# Altium PCB main.PcbDoc (part 4 of 8)
Units mil, origin at the board's own origin, x right, y up, seen from the top; angles counter-clockwise.
Board outline 3385.83 x 2362.2 mil, 8 copper layers (L1 (SIG), L2 (GND), L3 (SIG), L4 (GND), L5 (PWR), L6 (SIG), L7 (GND), L8 (SIG)), stack 46.958 mil thick; 318 components, 288 nets, 1482 pads, 1056 vias.
Unrouted connection lines stored in the file: 7.
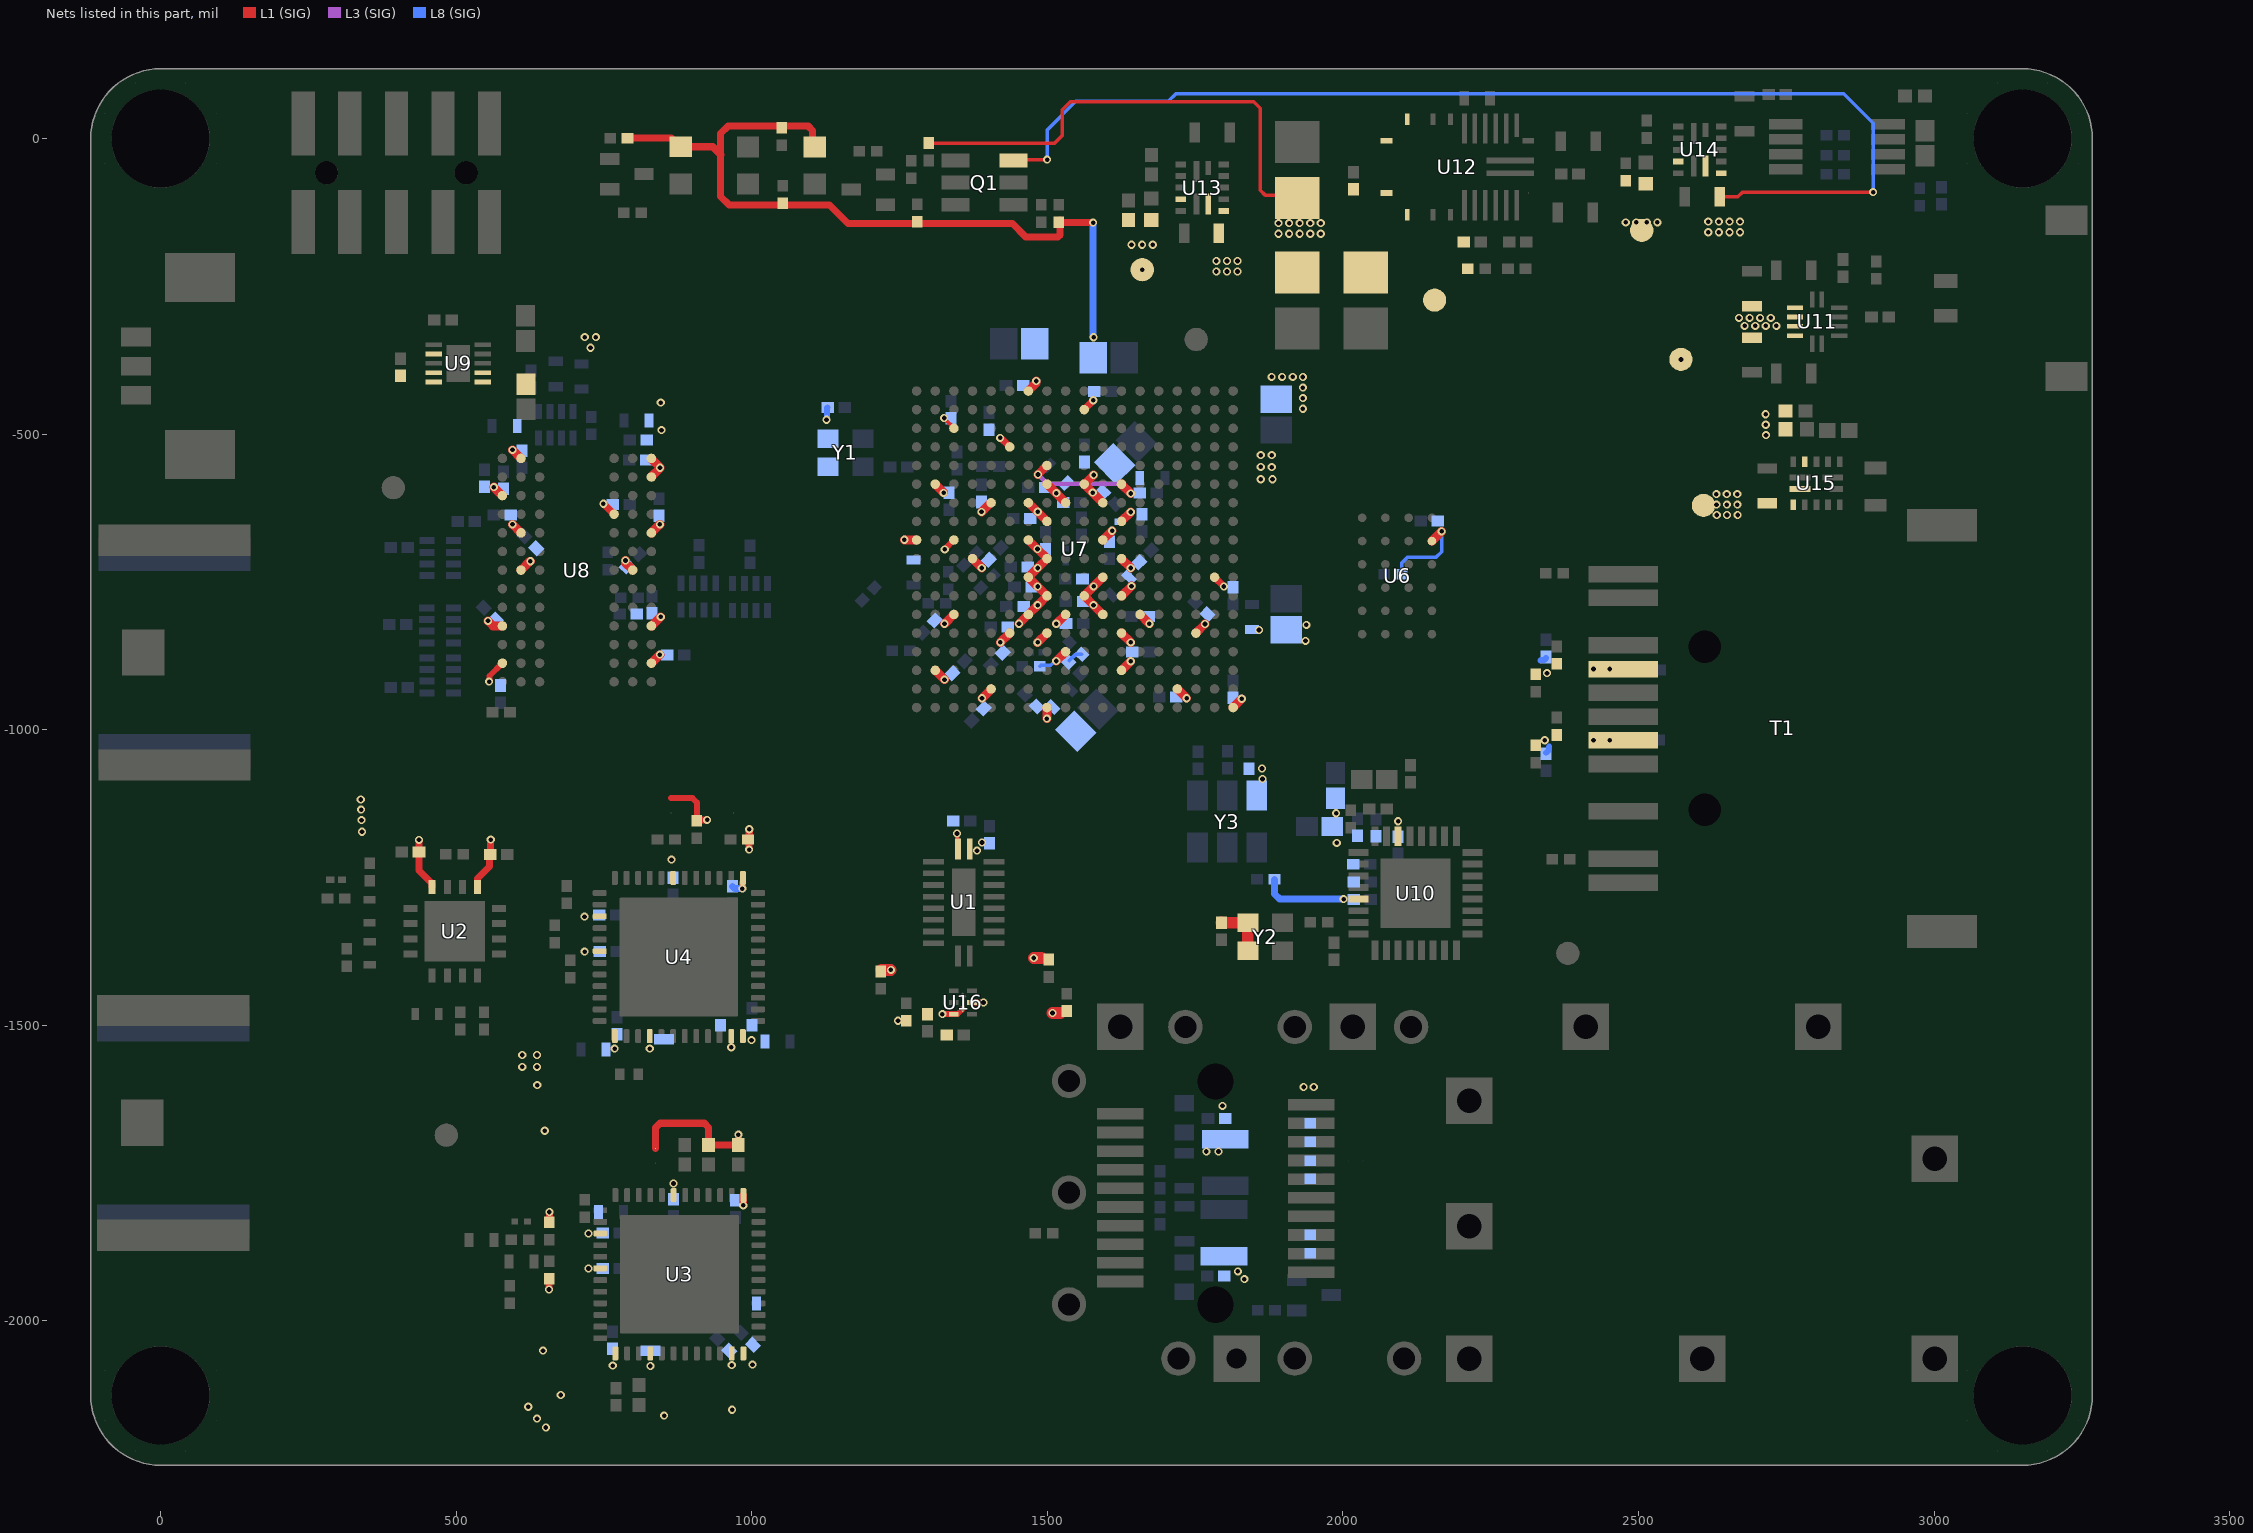
[diagram p8: the nets of this part, all layers, seen from the top]

## Part data (continued)
U4: "3 Gbps, HD, SD, DVB-ASI SDI Deserializer with Loopthrough and LVDS Interface, 48-pin LLP, Pb-Free", Case/Package=0402, Manufacturer="Texas Instruments", Manufacturer Part Number=RC0402FR-075KL, Max Operating Temperature=155°C, Max Power Dissipation=63mW, Min Operating Temperature=-55°C, PackageTopMarking=NS*UZXYTTE#*L0341, Power Dissipation=62.5mW, PowerWise=N, Supplier Part Number=3950792, Temperature Coefficient=100ppm/°C, Tolerance=1%, Voltage Rating=50V, Category="Chip SMD Resistors", China RoHS=Non-Compliant, Code_JEDEC=MO-220-WKKD-2, ComponentLink1Description="Datasheet URL", ComponentLink1URL=http://www.ti.com/general/docs/lit/getliterature.tsp?genericPartNumber=LMH0341&fileType=pdf, ComponentLink2Description=https://datasheet.octopart.com:443/RC0402FR-075KL-Yageo-datasheet-127823281.pdf?src-supplier=Upverter, ComponentLink2URL=https://datasheet.octopart.com:443/RC0402FR-075KL-Yageo-datasheet-127823281.pdf?src-supplier=Upverter, ComponentLink3Description=https://datasheet.octopart.com:443/RC0402FR-075KL-Yageo-datasheet-137700087.pdf?src-supplier=IHS, ComponentLink3URL=https://datasheet.octopart.com:443/RC0402FR-075KL-Yageo-datasheet-137700087.pdf?src-supplier=IHS, ComponentLink4Description=https://datasheet.octopart.com:443/RC0402FR-075KL-Yageo-Group-datasheet-176638170.pdf?src-supplier=Future+Electronics, ComponentLink4URL=https://datasheet.octopart.com:443/RC0402FR-075KL-Yageo-Group-datasheet-176638170.pdf?src-supplier=Future+Electronics, ComponentLink5Description=https://datasheet.octopart.com:443/RC0402FR-075KL-Yageo-datasheet-164759695.pdf?src-supplier=Future+Electronics, ComponentLink5URL=https://datasheet.octopart.com:443/RC0402FR-075KL-Yageo-datasheet-164759695.pdf?src-supplier=Future+Electronics, ComponentLink6Description=https://datasheet.octopart.com:443/RC0402FR-075KL-Yageo-datasheet-175887523.pdf?src-supplier=Newark, ComponentLink6URL=https://datasheet.octopart.com:443/RC0402FR-075KL-Yageo-datasheet-175887523.pdf?src-supplier=Newark, ComponentLink7Description=https://datasheet.octopart.com/RC0402FR-075KL-Yageo-datasheet-73766026.pdf, ComponentLink7URL=https://datasheet.octopart.com/RC0402FR-075KL-Yageo-datasheet-73766026.pdf, ComponentLink8Description=http://sigma.octopart.com:80/conflict_mineral_statement/Yageo-company-3.pdf?src-supplier=Compliance+Statements, ComponentLink8URL=http://sigma.octopart.com:80/conflict_mineral_statement/Yageo-company-3.pdf?src-supplier=Compliance+Statements, ComponentLink9Description=http://sigma.octopart.com:80/rohs_statement/Yageo-company-2.pdf?src-supplier=Compliance+Statements, ComponentLink9URL=http://sigma.octopart.com:80/rohs_statement/Yageo-company-2.pdf?src-supplier=Compliance+Statements, Composition="Thick Film", CompType="Interface IC", Country of Origin="Mainland China, Taiwan", Export Control Classification Number (ECCN) Code=EAR99, Features="Moisture Resistant", Harmonized Tariff Schedule (HTS) Code=8533.21.00.30, Height=350µm, Introduction Date=2011-11-17, Length=990.6µm, Lifecycle Status=Production, Mounting Technology="Surface Mount", Number of Terminals=2, Number of Terminations=2, PackageDescription="LLP, Plastic, Quad, 7 x 7 x 0.8mm Body, 48 Lead, 0.5mm Pitch, No Pullback", PackageReference=RHS0048A, Part Number=LMH0341SQX/NOPB, PinCount=48, Power Rating=62.5mW, Pricing="10=2.15, 100=1.16, 500=0.992, 2500=0.823, 5000=0.807 (JPY)", REACH SVHC=Yes, RoHS=Y, Schedule B="8533210045, 8533210045|8533210045|8533210045|8533210045|8533210045", Stock=54567, Supplier=Farnell, Width=500µm, Working Voltage=50V
U5: "IC POWER SUPPLY SEQUENCER 8VSSOP", Manufacturer="Texas Instruments", Max Junction Temp=+125°C, Max Supply Voltage=5.5V, Min Supply Voltage=2.7V, Nominal Supply Current=80uA, Output Current=0.001uA, Package=DGK0008A, Temperature="-40°C to +125°C", Temperature Range Low=-40°C, Threshold Voltage=1.22V, Automotive=No, Category=IC, ComponentLink2Description=Datasheet, ComponentLink2URL=http://www.ti.com/lit/ds/symlink/lm3881.pdf, Device Class L1="Integrated Circuits (ICs)", Device Class L2="Power Management ICs", Device Class L3="Voltage Supervisors", Digikey Description="IC POWER SUPPLY SEQUENCER 8VSSOP", Footprint 0 Description="TSOP, 8-Leads, Body 3x3mm, Pitch 0.65mm, IPC Medium Density", Footprint 1 Description="TSOP, 8-Leads, Body 3x3mm, Pitch 0.65mm, IPC High Density", Footprint 2 Description="TSOP, 8-Leads, Body 3x3mm, Pitch 0.65mm, IPC Low Density", Height=1.1mm, Ipc Land Pattern Name=SOP65P300X110-8, Lead Free=Yes, Manufacturer Part Number=LM3881MME/NOPB, Mouser Description="3 Rail Simple Power Sequencer with Adjustable Time Delay 8-VSSOP -40 to 125", Number of Outputs=3, Number Of Rails Monitored=1, Octopart=https://octopart.com/lm3881mme%2Fnopb-texas+instruments-24814197, Reset Timeout=9.6ms, Reset Type="Active Low,Active High", RoHS=TRUE, Standoff Height=0.05mm, Temperature Range High=+125°C
U6: "Integrated Circuit", Manufacturer_Name=Infineon, Mouser Part Number=797-25FL256SAGBHI200, Arrow Part Number=S25FL256SAGBHI200, Arrow Price/Stock=https://www.arrow.com/en/products/s25fl256sagbhi200/infineon-technologies-ag?utm_currency=USD&region=nac, Datasheet Link=https://www.cypress.com/file/448601/download, Height=1.2mm, Manufacturer_Part_Number=S25FL256SAGBHI200, Mouser Price/Stock=https://www.mouser.co.uk/ProductDetail/Infineon-Technologies/S25FL256SAGBHI200?qs=%252B97ACBfLqz%2F7D9cRggMsKA%3D%3D
U7: "Integrated Circuit", Manufacturer_Name=AMD, Manufacturer_Part_Number=XC7A35T-2CSG324C, Mouser Part Number=217-XC7A35T-2CSG324C, Datasheet Link=https://www.xilinx.com/support/documentation/data_sheets/ds181_Artix_7_Data_Sheet.pdf, Height=1.5mm, Mouser Price/Stock=https://www.mouser.co.uk/ProductDetail/AMD-Xilinx/XC7A35T-2CSG324C?qs=rrS6PyfT74fMA9%2F3WtPZmw%3D%3D
U8: "Integrated Circuit", Arrow Part Number="MT41K512M8DA-107 IT:P", Manufacturer_Name=Micron, Mouser Part Number=340-265832-TRAY, Arrow Price/Stock=https://www.arrow.com/en/products/mt41k512m8da-107-itp/micron-technology?region=europe, Datasheet Link=https://datasheet.datasheetarchive.com/originals/distributors/DKDS42/DSANUWW0045409.pdf, Height=1.2mm, Manufacturer_Part_Number="MT41K512M8DA-107 IT:P", Mouser Price/Stock=https://www.mouser.co.uk/ProductDetail/Micron/MT41K512M8DA-107-ITP?qs=rrS6PyfT74e6FNRbiIMwlg%3D%3D
U9: "Integrated Circuit", Manufacturer_Name="Texas Instruments", Mouser Part Number=595-TPS51206DSQR, Arrow Part Number=TPS51206DSQR, Arrow Price/Stock=https://www.arrow.com/en/products/tps51206dsqr/texas-instruments?region=nac, Datasheet Link=http://www.ti.com/lit/ds/symlink/tps51206.pdf, Height=0.8mm, Manufacturer_Part_Number=TPS51206DSQR, Mouser Price/Stock=https://www.mouser.co.uk/ProductDetail/Texas-Instruments/TPS51206DSQR?qs=%252BG2H6gVb6ixLbD%2FQxTGyiQ%3D%3D
U10: library part TLK106RHBR, "Integrated Circuit", Manufacturer_Name="Texas Instruments", Mouser Part Number=595-TLK106RHBR, Arrow Part Number=TLK106RHBR, Arrow Price/Stock=https://www.arrow.com/en/products/tlk106rhbr/texas-instruments, Datasheet Link=http://www.ti.com/lit/gpn/tlk106, Height=1mm, Manufacturer_Part_Number=TLK106RHBR, Mouser Price/Stock=https://www.mouser.co.uk/ProductDetail/Texas-Instruments/TLK106RHBR?qs=1sbE9T7hb3adXa9F43EQXg%3D%3D
U11: "Integrated Circuit", Manufacturer_Name="Monolithic Power Systems (MPS)", Mouser Part Number=946-MP5077GG-Z, Datasheet Link=http://www.monolithicpower.com/DesktopModules/DocumentManage/API/Document/getDocument?id=3265, Height=1mm, Manufacturer_Part_Number=MP5077GG-Z, Mouser Price/Stock=https://www.mouser.co.uk/ProductDetail/Monolithic-Power-Systems-MPS/MP5077GG-Z?qs=AfGmtpoX2ghv3QovAD4CRg%3D%3D
U12: "Integrated Circuit", Manufacturer_Name="Monolithic Power Systems (MPS)", Mouser Part Number=946-MPM3860GQW-Z, Datasheet Link=https://www.monolithicpower.com/en/documentview/productdocument/index/version/2/document_type/Datasheet/lang/en/sku/MPM3860GQW-Z/document_id/8686/, Height=1.65mm, Manufacturer_Part_Number=MPM3860GQW-Z, Mouser Price/Stock=https://www.mouser.co.uk/ProductDetail/Monolithic-Power-Systems-MPS/MPM3860GQW-Z?qs=vmHwEFxEFR%2FBBZgXfldbaA%3D%3D
U13 U14 U15: "Integrated Circuit", Manufacturer_Name="Monolithic Power Systems (MPS)", Mouser Part Number=946-MPM3834CGPA-P, Datasheet Link=https://www.monolithicpower.com/en/documentview/productdocument/index/version/2/document_type/Datasheet/lang/en/sku/MPM3834CGPA/document_id/9651/, Height=1.31mm, Manufacturer_Part_Number=MPM3834CGPA-P, Mouser Price/Stock=https://www.mouser.co.uk/ProductDetail/Monolithic-Power-Systems-MPS/MPM3834CGPA-P?qs=By6Nw2ByBD1gcNTTHPVSOg%3D%3D
U16: "Integrated Circuit", Manufacturer_Name="Texas Instruments", Mouser Part Number=595-TCA39306DTMR, Arrow Part Number=TCA39306DTMR, Arrow Price/Stock=https://www.arrow.com/en/products/tca39306dtmr/texas-instruments?utm_currency=USD&region=nac, Datasheet Link=https://www.ti.com/general/docs/suppproductinfo.tsp?distId=26&gotoUrl=https://www.ti.com/lit/gpn/tca39306, Height=0.4mm, Manufacturer_Part_Number=TCA39306DTMR, Mouser Price/Stock=https://www.mouser.co.uk/ProductDetail/Texas-Instruments/TCA39306DTMR?qs=A6eO%252BMLsxmTNftHJNMUhEw%3D%3D
Y1: "MEMS OSC XO 100.0000MHZ HCMOS"
Y2: "Crystal or Oscillator", Manufacturer_Name=SiTime, Datasheet Link=https://www.sitime.com/support/resource-library/datasheets/sit8008-datasheet, Height=0.85mm, Manufacturer_Part_Number=SiT8008BI-73-XXS-25.000000
Y3: "Oscillator, 148.5Mhz, Lvds, 5Mm X 3.2Mm Rohs Compliant: Yes", Case/Package=CLCC, Max Input Voltage=3.465V, Max Operating Temperature=85°C, Max Output Frequency=999.9MHz, Min Input Voltage=3.135V, Min Operating Temperature=-40°C, ComponentLink1Description="Manufacturer's Website", ComponentLink1URL=http://www.renesas.com, ComponentLink2Description="Datasheet URL", ComponentLink2URL=https://octopart.com/cad-content/api/get-model-datasheet/15189/107081581, ComponentLink3Description="Manufacturer's Package Drawing", ComponentLink3URL=https://www.renesas.com/en/document/psc/js6-package-outline-50-x-32-mm-body-11-mm-thick, Height=1.2mm, HelpURL=https://octopart.com/cad-content/api/get-model-datasheet/15189/107081581, Mount="Surface Mount", Number of Pins=6, Output Type=LVDS, RoHS=Compliant

## Via types
v1: diameter 13.78, hole 7.87, L1 (SIG) to L8 (SIG), tented both sides, 1033 vias
v2: diameter 13.78, hole 7.87, L1 (SIG) to L8 (SIG), 23 vias

## Nets (pads, with @x,y where several pads share a name; then routed paths per layer and width w, separated by ;. In a path a pad name is that pad's centre, name@x,y a point inside that pad or via, vN(x,y) a via of type N, cw(c..) or ccw(c..) an arc to the next point about the centre after c; other vN are vias at no path point)
+1V0: C15.1 C16.2 C18.2 C21.2 C22.2 C99.1 C111.2 C112.2 C114.2 C115.2 C116.2 C117.2 C118.2 C120.2 C121.2 C122.2 C123.2 C124.2 C125.1 C126.1 C127.1 R6.1 R9.1 TP3.1 U7.F8 U7.F10 U7.G7 U7.G9 U7.G11 U7.H8 U7.J7 U7.J11 U7.K8 U7.L7 U7.L11 U7.M8 U7.M10 U7.N7 U7.N9 U7.N11 U12.9 U12.10 U12.11 U12.12 | length 1313.9
  L1 (SIG) w6: R9.1@1299.36,-7.59 1512.63,-7.59 1525.29,5.08 1525.29,48.51 1538.89,62.11 1849.4,62.1 1860.05,51.45 1860.05,-87.34 1868.22,-95.5 1919.34,-95.5 C16.2@1922.58,-92.27
  L1 (SIG) w10: U7.J7@1467.85,-679.01 U7.J7@1468,-679.01 ; v1@1483.16,-694.18 v1(1483.31,-694.18)
  L1 (SIG) w15: v1(1452.11,-820.74) U7.N7@1467.85,-805 v1(1483.6,-789.25) U7.M8@1499.35,-773.5 U7.L7@1467.85,-742 v1(1483.6,-726.26) U7.K8@1499.35,-710.51 ; U7.G7@1467.85,-616.02 1468.12,-616.02 U7.H8@1498.95,-646.85 ; U7.J7@1468,-679.01 v1@1483.16,-694.18 ; v1(1483.31,-694.18) 1499.5,-710.37 U7.K8@1499.5,-710.51 ; U7.F8@1499.35,-584.52 1499.66,-584.52 1514.81,-599.67 v1(1515.22,-599.67) ; v1(1515.1,-820.74) U7.N9@1530.85,-805 ; v1@1515.22,-600.13 U7.G9@1530.44,-615.35 ; U7.F10@1562.34,-584.52 U7.G11@1593.84,-616.02 ; U7.F10@1562.64,-584.08 1562.87,-584.3 1563.76,-583.41 1563.9,-583.41 v1(1578.25,-569.07) ; U7.N11@1593.84,-805 v1(1578.09,-789.25) U7.M10@1562.34,-773.5 1562.34,-773.36 v1(1578.22,-757.48) 1593.7,-742 U7.L11@1593.84,-742 ; U7.J11@1593.84,-679.01 v1(1609.59,-663.26)
  other v1: 1483.6,-757.75 1483.72,-631.17 1576.75,-598.93 1891.01,-160.94 1908.89,-160.94 1926.78,-160.94 1944.66,-160.94 1962.55,-160.94 1891.01,-143.05 1908.89,-143.05 1926.78,-143.05 1944.66,-143.05 1962.55,-143.05
+1V8: C14.1 C17.1 C103.1 C104.1 C105.1 C107.1 C108.1 C109.1 FB1.1 Q1.3 R5.1 TP4.1 U7.E8 U7.F12 U7.H12 U7.K12 U7.M12 U14.6 U14.9 U14.10 | length 2209.3
  L1 (SIG) w6: Q1.3@1442.79,-37.11 1444.32,-35.57 v1(1499.58,-35.57) ; C14.1@2639.55,-98.51 2667.86,-98.51 2675.82,-90.56 v1(2896.74,-90.56)
  L1 (SIG) w10: U7.M12@1625.33,-773.5 U7.M12@1625.82,-773.5
  L1 (SIG) w15: v1(1484.14,-568.15) 1499.46,-552.83 U7.E8@1499.46,-552.61 ; U7.K12@1625.33,-710.51 v1(1641.08,-726.26) ; U7.H12@1625.33,-647.52 v1(1641.08,-631.77) ; U7.F12@1625.33,-584.52 v1@1641.06,-600.25 ; U7.M12@1625.82,-773.5 v1(1642.36,-756.96)
  L3 (SIG) w8: v1(1484.14,-568.15) 1499.66,-583.68 1624.53,-583.68 1639.22,-598.36 1639.59,-598.36 v1@1640.02,-597.93
  L8 (SIG) w6: v1(1499.58,-35.57) 1499.58,14.6 1547.84,62.86 1704.69,62.86 1717.62,75.79 2847.05,75.79 2897.11,25.73 2897.11,-90.19 v1(2896.74,-90.56)
  other v1: 1641.1,-600.25 1932.16,-457 1932.16,-439.11 1932.16,-421.23 1879.31,-403.05 1897.2,-403.05 1915.08,-403.05 1932.16,-403.34 2618.01,-158.42 2635.9,-158.42 2653.78,-158.42 2671.67,-158.42 2478.27,-141.72 2496.16,-141.72 2514.04,-141.72 2531.93,-141.72 2618.01,-140.53 2635.9,-140.53 2653.78,-140.53 2671.67,-140.53
+1V35: C4.1 C5.1 C23.1 C29.2 C54.2 C85.2 C86.2 C87.2 C88.2 C90.2 C162.2 C173.1 C174.1 C175.1 C176.1 C177.1 C181.1 C182.1 C183.1 C184.1 C185.1 C186.1 C187.1 C188.1 C189.1 C190.1 C191.1 C192.1 R1.1 TP2.1 U7.A7 U7.C3 U7.D6 U7.F2 U7.G5 U7.J1 U7.J3 U8.A2 U8.A9 U8.B9 U8.C1 U8.D7 U8.E2 U8.E9 U8.G2 U8.G8 U8.K1 U8.K9 U8.M1 U8.M9 U9.1 U9.2 U13.6 U13.9 U13.10 Y1.1 Y1.4 | length 480.8
  L1 (SIG) w6.41: v1@1326.59,-473.78 1326.59,-474.31 U7.C3@1341.87,-489.59
  L1 (SIG) w10: v1(555.68,-918.63) 556.41,-917.91 556.41,-909.14 U8.M1@578.15,-887.4 ; U8.K1@578.15,-824.41 U8.K1@578.15,-824.41 ; U8.E2@609.54,-666.82 U8.E2@609.59,-666.82 ; U8.G2@609.64,-729.92 U8.G2@609.64,-729.65 ; U7.F2@1310.37,-584.86 U7.F2@1310.37,-584.52 ; v1(1324.48,-599.3) v1@1324.48,-598.97 ; v1@1325.37,-473.1 v1(1325.37,-472.66) ; v1(1326.32,-694.89) 1326.32,-694.56 U7.J3@1341.87,-679.01 ; v1(1388.69,-631.49) v1@1389.04,-631.49 ; U7.G5@1404.51,-616.02 U7.G5@1404.86,-616.02 ; U7.A7@1467.85,-427.04 U7.A7@1467.85,-425.38
  L1 (SIG) w12: v1(748.92,-617.78) 749.19,-617.78 766.85,-635.43 U8.D7@767.12,-635.43 ; v1(1420.04,-506.25) 1420.38,-506.59 1421.26,-506.59 1434.92,-520.26 1435.09,-520.26 U7.D6@1436.36,-521.53
  L1 (SIG) w15: v1(553.89,-815.79) 562.29,-824.19 577.82,-824.19 U8.K1@578.15,-824.41 ; v1@563.79,-589.53 U8.C1@578.1,-603.83 ; v1(595.24,-652.52) U8.E2@609.54,-666.82 ; v1@595.29,-526.53 U8.A2@609.59,-540.84 ; U8.G2@609.64,-729.65 609.7,-729.7 610.17,-729.7 624.81,-715.07 v1(625.47,-715.07) ; v1(786.35,-713.69) 786.35,-717.34 798.51,-729.5 U8.G8@798.51,-729.97 ; U8.M9@830.22,-887.35 v1@844.53,-873.05 ; U8.E9@830.22,-666.88 v1(844.53,-652.52) ; U8.K9@830.49,-824.03 830.64,-824.19 845.75,-809.08 v1(846.09,-809.08) ; U8.B9@830.52,-572.09 830.33,-571.91 844.73,-557.52 844.73,-555.86 830.33,-541.47 830.33,-541.38 U8.A9@830.52,-541.19 ; v1(1258.21,-678.67) 1258.33,-678.79 1278.66,-678.79 U7.J1@1278.88,-679.01 ; U7.F2@1310.37,-584.86 v1@1324.48,-598.97 ; v1@1389.04,-631.49 U7.G5@1404.51,-616.02 ; U7.A7@1467.85,-426.52 1468.07,-426.52 1481.29,-413.29 v1(1481.29,-409.94)
  L8 (SIG) w10: v1(1126.42,-475.56) 1127.15,-474.84 1127.15,-455.95 C29.2@1128.45,-454.65
  other v1: 844.53,-872.99 563.74,-589.53 844.73,-556.7 595.24,-526.53 847.26,-493.12 846.17,-446.57 727.19,-353.86 717.43,-335.85 736.36,-335.85 1785.94,-224.94 1803.83,-224.94 1821.71,-224.94 1660.46,-221.77 1785.94,-207.06 1803.83,-207.06 1821.71,-207.06 1642.39,-179.72 1660.27,-179.72 1678.16,-179.72
+2V5: C59.1 C60.1 C61.1 C62.1 C63.1 C91.1 C92.1 C93.1 C94.1 C95.1 C96.1 C97.1 C98.1 C101.2 C113.1 C130.1 C131.1 C132.1 C150.1 C160.1 C161.1 R24.1 R33.1 R64.2 R65.2 R74.1 TP5.1 U1.20 U3.7 U3.15 U3.18 U3.25 U3.35 U4.7 U4.25 U4.35 U7.K4 U7.N3 U7.P6 U7.T2 U7.U5 U7.V8 U15.6 U15.9 U15.10 U16.2 | length 208.3
  L1 (SIG) w10: U16.2@1372.46,-1461.25 v1(1392.07,-1461.25)
  L1 (SIG) w12: v1(657.09,-1946.82) 657.21,-1946.7 657.21,-1930.44 R65.2@657.33,-1930.32 ; R64.2@657.59,-1831.09 v1(657.59,-1815.61)
  L1 (SIG) w15: U7.T2@1310.37,-899.48 v1(1326.12,-915.23) ; v1(1326.12,-820.74) U7.N3@1341.87,-805 ; U7.K4@1373.37,-710.51 v1(1389.11,-726.26) ; v1(1389.55,-946.73) 1389.55,-946.6 1404.86,-931.29 U7.U5@1404.86,-930.98 ; v1(1420.61,-852.24) U7.P6@1436.36,-836.49 ; v1(1499.12,-981.09) 1499.13,-962.69 U7.V8@1499.35,-962.48
  L1 (SIG) w20: v1(1476.88,-1386.03) 1490.25,-1386.03 ; v1(1508.83,-1479.13) 1522.2,-1479.13
  other v1: 651.81,-2180.19 636.81,-2165.19 851.81,-2160.19 966.81,-2150.19 621.81,-2145.19 676.81,-2125.19 764.85,-2075.59 966.24,-2074.66 646.81,-2050.19 723.96,-1911.23 723.96,-1852.17 867.71,-1767.38 649.85,-1678.3 637.16,-1601.16 611.81,-1570.19 636.81,-1570.19 611.81,-1550.19 636.81,-1550.19 768,-1539.4 965.28,-1536.96 864.28,-1219.59 1381.12,-1204.5 1389.55,-1190.83 2632.22,-636.72 2649.73,-636.72 2667.54,-636.72 2631.91,-619.11 2649.41,-619.11 2667.22,-619.11 2631.59,-601.49 2649.09,-601.49 2666.91,-601.49 2715.58,-501.64 2715.26,-484.02 2714.95,-466.41
+3V3: C1.1 C2.1 C26.1 C30.1 C31.1 C32.1 C37.1 C39.1 C40.2 C42.2 C43.2 C44.2 C45.2 C46.2 C47.2 C48.2 C49.2 C50.2 C52.1 C53.1 C55.2 C56.2 C75.1 C78.1 C79.1 C80.1 C81.1 C82.1 C83.1 C84.1 C102.1 C110.1 C119.1 C128.1 C134.1 C135.1 C136.1 C137.1 C138.2 C148.1 C149.1 C151.2 C152.1 C157.2 C193.1 C194.1 L3.2 L4.2 LED2.2 LED3.2 R10.1 R13.2 R14.2 R15.1 R16.2 R17.1 R22.1 R23.1 R26.1 R27.2 R28.1 R29.2 R30.1 R36.1 R54.1 R70.1 R71.1 R78.1 R80.2 R82.1 R83.1 R84.1 R85.2 R86.1 R87.1 SB2.1 SB3.1 T1.2 T1.5 TP1.1 U1.1 U2.13 U2.16 U3.1 U3.28 U3.36 U4.1 U4.15 U4.18 U4.28 U4.36 U6.B4 U7.B10 U7.L17 U7.N13 U7.P8 U7.P12 U7.P16 U7.R9 U7.T12 U7.U15 U7.V18 U9.7 U9.9 U9.10 U10.14 U10.21 U11.7 U11.8 U11.9 U11.10 U16.7 U16.8 Y2.1 Y2.4 Y3.6 | length 2697.9
  L1 (SIG) w6: v1(1347.11,-1175.5) 1348.01,-1176.4 1348.01,-1200.63 U1.1@1348.91,-1201.53
  L1 (SIG) w10: SB2.1@863.33,-1115.45 899.5,-1115.45 907.08,-1123.03 R54.1@907.08,-1152.16 ; v1(1322.38,-1480.93) U16.7@1341.76,-1480.93 1348.06,-1480.93 U16.8@1357.11,-1471.88
  L1 (SIG) w12: v1(437.16,-1186.26) 437.26,-1186.36 437.26,-1205.44 437.08,-1205.62 437.08,-1237.87 459.36,-1260.16 U2.16@459.36,-1266.07 ; U2.13@536.13,-1266.07 536.13,-1251.52 556.42,-1231.24 556.42,-1212.87 C53.1@557.92,-1211.37 ; C53.1@558.33,-1205.52 558.33,-1185.85 v1(558.43,-1185.76) ; R80.2@789.93,0.64 864.38,0.64 877.6,-12.58 LED3.2@879.22,-12.58 ; SB3.1@837.08,-1708.32 837.08,-1701.45 837.08,-1673.22 844.68,-1665.62 920.05,-1665.62 927.08,-1672.65 R71.1@927.08,-1702.16 R70.1@977.08,-1702.16 ; LED3.2@879.87,-13.87 933.95,-13.87 947.48,-27.4 ; R54.1@907.31,-1152.37 v1(924.43,-1152.37) ; 960.28,21.25 947.36,8.33 947.36,-97.71 961.98,-112.33 1052.18,-112.33 1131.48,-112.33 1162.91,-143.76 1440.78,-143.76 1463.35,-166.33 1518.21,-166.33 1521.73,-162.82 R10.1@1521.73,-142.23 ; 960.28,21.44 1037.18,21.44 ; R70.1@977.28,-1701.92 v1(977.29,-1684.8) ; v1(984.16,-1268.65) U4.1@984.16,-1258.26 ; v1(985.66,-1804.52) U3.1@985.66,-1787.4 ; v1(995.54,-1202.75) R30.1@995.54,-1185.62 ; R30.1@995.75,-1185.39 v1(995.75,-1168.26) ; 1037.18,20.94 1095.51,20.94 1102.54,13.91 1102.54,-9.3 LED2.2@1107.72,-14.48 ; R10.1@1519.36,-141.64 1519.95,-142.23 R10.1@1521.73,-142.23 ; R10.1@1520.95,-137.53 1521.73,-138.31 R10.1@1521.73,-142.23 ; U7.B10@1562.34,-458.54 1562.34,-458.19 1577.67,-442.87 v1(1577.67,-442.52) ; v1(1577.36,-142.23) R10.1@1521.73,-142.23 ; U7.L17@1782.81,-742 v1(1798.56,-757.75)
  L1 (SIG) w15: v1(1483.6,-852.24) U7.P8@1499.35,-836.49 ; v1(1515.1,-883.74) U7.R9@1530.85,-867.99 ; U7.T12@1625.33,-899.48 1625.58,-899.48 v1(1641.03,-884.04) ; U7.P12@1625.33,-836.49 v1(1641.08,-852.24) ; U7.N13@1656.83,-805 v1(1672.58,-820.74) ; U7.U15@1719.82,-930.98 v1(1735.57,-946.73) ; U7.P16@1751.32,-836.49 U7.P16@1751.32,-836.49 v1(1766.69,-821.07) ; U7.V18@1814.31,-962.48 1814.31,-962.17 v1(1828.8,-947.65) ; U6.B4@2150.55,-680.78 v1(2166.87,-664.46)
  L1 (SIG) w20: R22.1@1219.35,-1405.9 1219.35,-1406.14 v1(1235.23,-1406.14) ; C40.2@1794.17,-1326.19 1794.42,-1326.44 1838.8,-1326.44 Y2.4@1839.06,-1326.69 Y2.1@1839.06,-1373.94
  L8 (SIG) w6: R16.2@1487.11,-892.89 1489.22,-890.78 1505.95,-890.78 1512.89,-883.83 v1@1515.22,-883.83 ; C30.1@1536.74,-883.56 1547.68,-872.62 1548.61,-872.62 1549.3,-871.92 1557.59,-871.92 R17.1@1558.28,-872.62 ; v1@1577.15,-335.26 v1@1577.82,-335.93 ; R15.1@2099.11,-737.27 2099.11,-718.32 2109.59,-707.85 2157.95,-707.85 2166.87,-698.92 2166.87,-665.32 v1@2167.37,-664.83
  L8 (SIG) w10: 2334.48,-882.97 2335.2,-882.25 2340.4,-882.25 C50.2@2343.79,-878.86 ; C56.2@2343.79,-1038.86 2348.18,-1034.47 2348.18,-1028.92 2348.9,-1028.19
  L8 (SIG) w12: C135.1@967.23,-1264.83 967.23,-1265.01 970.53,-1268.31 983.82,-1268.31 v1(984.16,-1268.65) ; v1@1577.15,-335.26 v1@1577.15,-142.28 ; R36.1@1884.16,-1253.15 1884.16,-1277.56 1893.16,-1286.55 v1(2001.08,-1286.55)
  other v1: 828.56,-2076.22 1001.18,-2073.91 1833.26,-1929.3 1822.19,-1916.07 1768.9,-1713.28 1789.47,-1713.47 1796.34,-1636.14 1933.51,-1604.22 1950.49,-1604.22 827.54,-1539.31 999.53,-1525.07 1247.43,-1492.19 717.36,-1375.23 717.19,-1316.01 1989.46,-1191.26 340.71,-1172.42 2093.28,-1154.77 339.84,-1152.88 1988.49,-1141.22 339.25,-1135.09 338.67,-1117.89 1863.98,-1083.4 1863.19,-1065.57 2341.29,-1017.75 2423.79,-1017.53 2451.29,-1017.53 2345.28,-904.28 2423.79,-897.28 2451.29,-897.28 1936.78,-849.72 1857.93,-831.29 1938.07,-822.6 1860.84,-576.19 1880.73,-576.19 1879.68,-555.82 1860.84,-555.24 1860.84,-535.45 1879.68,-535.45 2571.78,-373.57 1578.23,-336.13 2679.49,-316.78 2697.38,-316.78 2715.26,-316.78 2733.15,-316.78 2669.96,-303.36 2687.85,-303.36 2705.73,-303.36 2723.62,-303.36